# Altium PCB Zasilanie.PcbDoc
Units mil, origin at the board's own origin, x right, y up, seen from the top; angles counter-clockwise.
Board outline 3935 x 2605 mil, 2 copper layers (Top Layer, Bottom Layer); 21 components, 10 nets, 53 pads, 0 vias.
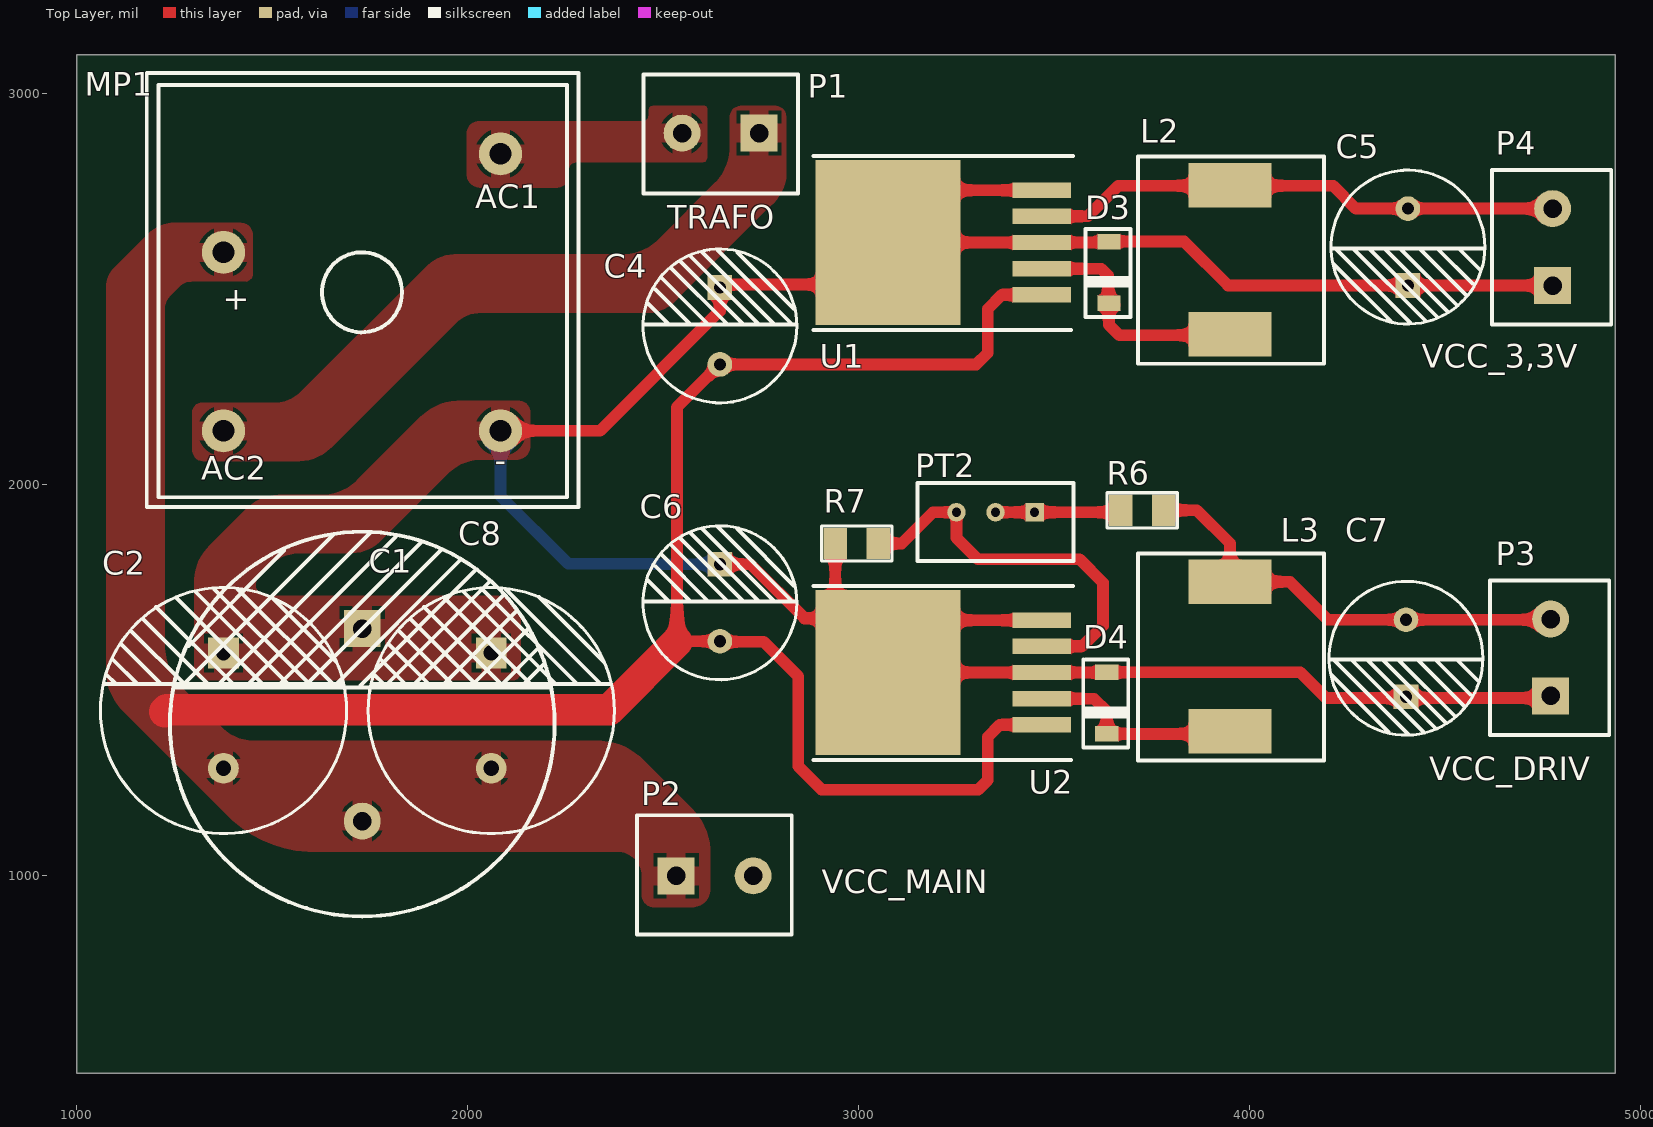
[diagram p0: Top Layer view]
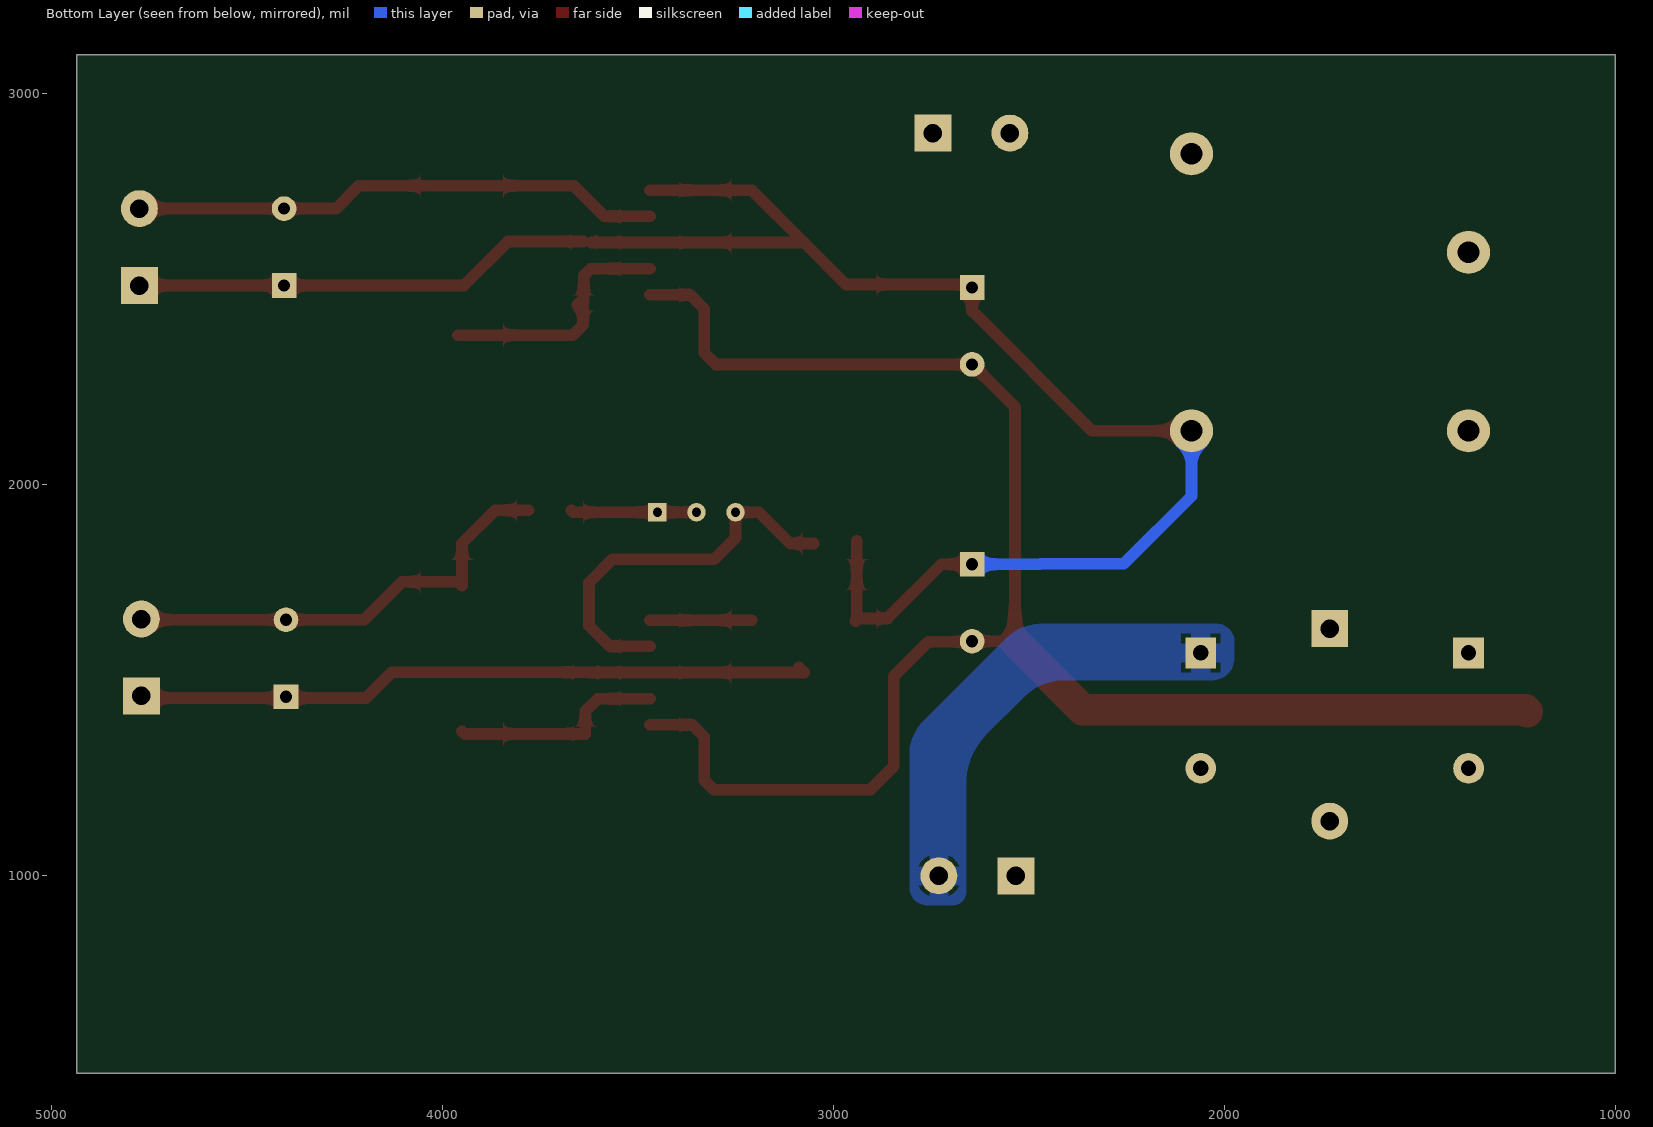
[diagram p1: Bottom Layer view, seen from below]
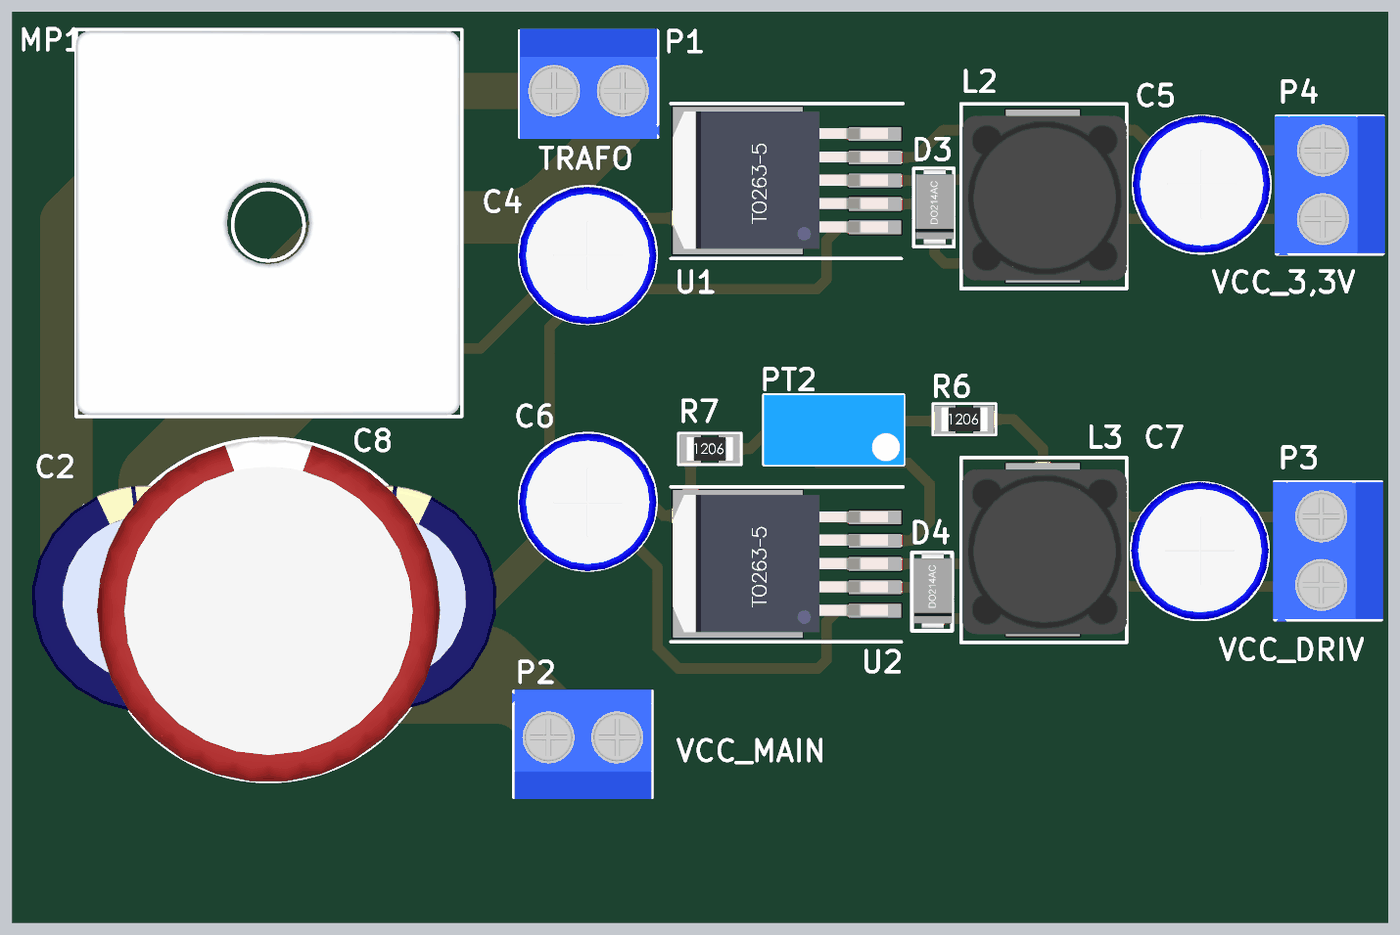
[diagram p2: 3D render of the assembled board from above, using the file's embedded part models]

## Layer stack, top to bottom
Top Solder: solder mask 0.4, Solder Resist, Dk 3.5
Top Layer: signal copper 1.4
Dielectric 1: dielectric 12.6, FR-4, Dk 4.8
Bottom Layer: signal copper 1.4
Bottom Solder: solder mask 0.4, Solder Resist, Dk 3.5

## Board outline
1000,495 4935,495 4935,3100 1000,3100

## Design rules (kind name [scope] priority, off if disabled: settings)
Clearance [All] p1: gap=10 ignorepadtopadclearanceinfootprint=FALSE except(0: Arc-Hole Track-Hole SMDPad-Hole THPad-Hole Via-Hole Fill-Hole Poly-Hole Region-Hole Text-Hole)
Height [All] p1: minheight=0 maxheight=5000 prefheight=500
PlaneConnect PlaneConnect_1 [All] p1: planeconnectstyle=Relief reliefexpansion=20 reliefentries=4 reliefconductorwidth=10 reliefairgap=10
PolygonConnect Power [All vs InNetClass('Power')] p1: thpad.connectstyle=Relief thpad.reliefconductorwidth=50 thpad.reliefentries=4 thpad.polygonreliefangle="90 Angle" thpad.airgapwidth=10 smdpad.connectstyle=Relief smdpad.reliefconductorwidth=50 smdpad.reliefentries=4 smdpad.polygonreliefangle="90 Angle" smdpad.airgapwidth=10 via.connectstyle=Direct via.reliefconductorwidth=10 via.reliefentries=4 via.polygonreliefangle="90 Angle" via.airgapwidth=10
PolygonConnect [All] p2: connectstyle=Relief reliefconductorwidth=10 reliefentries=4 polygonreliefangle="90 Angle" airgapwidth=10
RoutingVias [All] p1: holewidth=28 width=50 viastyle="Through Hole" minholewidth=28 minwidth=50 maxholewidth=28 maxwidth=50
SolderMaskExpansion [All] p1: expansion=4 istentingtop=FALSE
Width [All] p1: maxlimit=200 minlimit=10 preferedwidth=10 minimp=50.000000 maximp=50.000000 favimp=50.000000
28 further rules are at their usual default settings.

## Classes and differential pairs
net class Power: GND NetMP1_1 NetMP1_2 VCC_Main

## Components (designator, comment, footprint, x,y, rotation, side; value= is the part's Value field where it differs from the comment)
C1 "Kondesator elektrolityczny" C_POL_D16x25 2060,1570.28 r270 top
C2 "Kondesator elektrolityczny" C_POL_D16x25 1375,1570.28 r270 top
C4 "Kondesator elektrolityczny" C_POL_D10x16 2645,2505 r270 top
C5 "Kondesator elektrolityczny" C_POL_D10x16 4405,2510 r90 top
C6 "Kondesator elektrolityczny" C_POL_D10x16 2645,1796.85 r270 top
C7 "Kondesator elektrolityczny" C_POL_D10x16 4400,1458.15 r90 top
C8 "Kondesator elektrolityczny" C_POL-D25X50 1730,1632.13 r270 top
D3 "SK34SMA" DO-214AC 3640,2465 r90 top
D4 "SK34SMA" DO-214AC 3634.53,1362.99 r90 top
L2 "" DE1207 3950,2385 r0 top
L3 "" DE1207 3950,1370 r0 top
MP1 "KBPC5010W" KBPC5010W 2083.66,2138.31 r0 top
P1 "TRAFO" ARK2-5mm 2745,2900 r270 top
P2 "VCC_MAIN" ARK2-5mm 2533.15,1000 r90 top
P3 "VCC_DRIV" ARK2-5mm 4770,1460 r180 top
P4 "VCC_3,3V" ARK2-5mm 4775.02,2510 r180 top
PT2 "Potentiometer" Potecjomert 3450,1930 r180 top
R6 "Rezystor" SMD-1206-RES 3725,1935 r270 top
R7 "Rezystor" SMD-1206-RES 2995,1850 r270 top
U1 "AP1501" TO263-5L 3468.7,2486.14 r90 top
U2 "AP1501" TO263-5L 3468.7,1386.14 r90 top

## Footprints (in the part's own frame and the unit in brackets; to place one, negate y for a bottom-side part, rotate by r counter-clockwise, add the part's x,y. Pads: shape width x height; smd on the part's side, far side on the other; paste and mask are expansions set on the pad)
ARK2-5mm [mm] "ARK2-5mm"
  rect 2.4x2.4 hole 1.2: 1(0,0)
  round 2.4 hole 1.2: 2(0,-5)
  silkscreen extent -3.81,-7.51 3.94,2.54, body extent -3.94,-7.49 4.06,2.66, height 10.13
C_POL-D25X50 [mm]
  rect 2.4x2.4 hole 1.2: 1(0,0)
  round 2.4 hole 1.2: 2(12.5,0)
  silkscreen extent -6.3,-12.5 18.7,12.5, body extent -6.22,-12.5 18.78,12.5, height 50
C_POL_D10x16 [mm]
  rect 1.6x1.6 hole 0.8: 1(0,0)
  round 1.6 hole 0.8: 2(5,0)
  silkscreen extent -2.5,-5 7.5,5, body extent -2.49,-5.03 7.57,5.03, height 16.33
C_POL_D16x25 [mm]
  rect 2x2 hole 1: 1(0,0)
  round 2 hole 1: 2(7.5,0)
  silkscreen extent -4.25,-8 11.75,8, body extent -4.44,-8.24 12.05,8.24, height 26.4
DE1207 [mm]
  rect 5.4x2.9 smd: 1(0,0) 2(0,9.7)
  silkscreen extent -5.97,-1.91 6.1,11.56, body extent -5.87,-1.3 6.13,10.7, height 8
DO-214AC [mm]
  rect 1x1.5 smd: 1(0,0) 2(4,0)
  silkscreen extent -0.89,-1.4 4.83,1.52, body extent -0.71,-1.4 4.78,1.4, height 2.29
KBPC5010W [mm]
  round 2.8 hole 1.4: 1(0,18) 2(-18,0) 3(-18,11.6) 4(0,0)
  silkscreen extent -22.99,-4.95 5.08,23.24, body extent -23.03,-4.86 4.98,23.14, height 11.5
Potecjomert [mm]
  rect 1.2x1.2 hole 0.6: 1(0,0)
  round 1.2 hole 0.6: 2(2.54,0) 3(5.08,0)
  silkscreen extent -2.54,-1.91 7.62,3.18, body extent -2.54,-1.91 7.62,3.18, height 12.57
SMD-1206-RES [mil]
  rect 80x60 smd: 1(0,55) 2(0,-55)
  silkscreen extent -45,-90 45,90, body extent -34,-66 34,66, height 33
TO263-5L [mm]
  rect 1x3.8 smd: 1(0,0) 2(1.7,0) 3(3.4,0) 4(5.1,0) 5(6.8,0)
  rect 10.75x9.45 smd: 6(3.4,10)
  silkscreen extent -2.29,-2.03 9.02,14.86, body extent -1.57,-0.93 8.43,14.74, height 4.78

## Part data
D3 D4: "Dioda Schottky", Dostawca=TME, Kod TME=SK34SMA-3G-DIO, Montaż=THT, Nazwa="Dioda Schottky", Obudowa=DO-214AC, Oznaczenie=SK34SMA, Parametr_1="Prąd: 3A", Parametr_2="Max prąd imp.: 80A", Parametr_3="Max nap. wsteczne: 40V", Producent="DIOTEC SEMICONDUCTOR"
L2 L3: library part Cewka, "Cewka", Dostawca=TME, Kod TME=DE1207-68, Montaż=SMD, Nazwa="Dławik mocy", Obudowa=DE1207, Parametr_1=47uH, Parametr_2="Prąd: 2,8", Parametr_3="Rezystancja: 120mOhm", Parametr_4="Toleracja: 20%", Parametr_5=Temperatura:, Producent=FERROCORE
  L2: Oznaczenie=3
  L3: Oznaczenie=DE1207-68
MP1: "Mostek porstowniczy", Kod TME=KBPC5010W, Montaż=THT, Nazwa="Mostek prostowniczy", Obudowa=MB-25W, Oznaczenie=KBPC5010W, Parametr_1="Prad: 50A", Parametr_2="Max Prad w impulsie: 500A", Parametr_3="Max Nap przewodzenia: 1,1V", Parametr_4="Max Nap wsteczne: 1kV", Parametr_5=Jednofazowy, Producent="DC COMPONENTS"
P1 P2 P3 P4: library part "Złacze śrubowe", Dostawca=TME, Kod TME=DG300-5.0-2P12, Montaż=THT, Nazwa="Listwa zaciskowa do druku, XY301V-2P", Parametr_1=250VDC/AC, Parametr_2=24A, Parametr_3=2,5mm2, Producent="DEGSON ELECTRONICS"
  P1: Oznaczenie=Transformator
  P2: Oznaczenie=Zasilanie
  P3: Oznaczenie=VCC_Driv
  P4: Oznaczenie=VCC_3,3V
PT2: "Potentiometer montażowy wielobortowy", Nazwa="Potentiometer montażowy wielobortowy", Parametr_1=10k, Parametr_2=Moc:, Parametr_3=Tolerancja:, Parametr_4=Charakterystyka:, Parametr_5="Temperatura pracy:", Parametr_6="Max nap. pracy:"
U1 U2: "przetwornica DC/DC buck", Dostawca=TME, Nazwa="przetwornica DC/DC buck", Parametr_2="Prąd: 3A", Parametr_3="Częstotliwość: 150kHz", Parametr_4="Temperatura: -20-85C", Parametr_5="Sprawność: 73%", Producent="DIODES INCORPORATED"
  U1: Kod TME=AP1501-33K5G-13, Oznaczenie=AP1501-3.3, Parametr_1="Nap. wy: 3.3V"
  U2: Kod TME=AP1501-K5G-13, Oznaczenie=AP1501-K5G-13, Parametr_1="Nap. wy: 1,23-37VV"
C1 C2: Dostawca=TME, Kod TME=UHW1H122MHD, Montaż=THT, Nazwa="Kondesator elektrolityczny", Obudowa=D16x25, Parametr_1=1200uF, Parametr_2=50V, Parametr_3=Tolerancja:, Parametr_4="Czas życzia:", Parametr_5="Temperatura pracy:"
C4 C6: Dostawca=TME, Kod TME=PF1H221MNN1016, Montaż=THT, Nazwa="Kondesator elektrolityczny", Obudowa=D10x16, Parametr_1=220uF, Parametr_2=50V, Parametr_3=Tolerancja:, Parametr_4="Czas życzia:", Parametr_5="Temperatura pracy:"
C5: Dostawca=TME, Kod TME=CE-220/16PHT-Y, Montaż=THT, Nazwa="Kondesator elektrolityczny", Obudowa=D10x16, Parametr_1=220uF, Parametr_2=50V, Parametr_3=Tolerancja:, Parametr_4="Czas życzia:", Parametr_5="Temperatura pracy:"
C7: Dostawca=TME, Kod TME=JRG-220U/25, Montaż=THT, Nazwa="Kondesator elektrolityczny", Obudowa=D10x16, Parametr_1=220uF, Parametr_2=50V, Parametr_3=Tolerancja:, Parametr_4="Czas życzia:", Parametr_5="Temperatura pracy:"
C8: Dostawca=TME, Nazwa="Kondesator elektrolityczny", Parametr_1=2200uF, Parametr_2=50V, Parametr_3=Tolerancja:, Parametr_4="Czas życzia:", Parametr_5="Temperatura pracy:"
R6: Nazwa=Rezystor, Parametr_1=10k, Parametr_2="Moc: 0,25W", Parametr_3="Tolerancja: 1%", Parametr_4="Max nap. pracy:", Parametr_5="Max nap impulsowe:"
R7: Nazwa=Rezystor, Parametr_1=1k, Parametr_2="Moc: 0,25W", Parametr_3="Tolerancja: 1%", Parametr_4="Max nap. pracy:", Parametr_5="Max nap impulsowe:"

## Nets (pads, with @x,y where several pads share a name; then routed paths per layer and width w, separated by ;. In a path a pad name is that pad's centre, name@x,y a point inside that pad or via, vN(x,y) a via of type N, cw(c..) or ccw(c..) an arc to the next point about the centre after c; other vN are vias at no path point)
GND: C1.1 C2.1 C4.1 C5.1 C6.1 C7.1 C8.1 D3.2 D4.2 MP1.4 P2.2 P3.1 P4.1 R7.2 U1.3 U1.5 U1.6 U2.3 U2.5 U2.6 | length 6735.5
  Top Layer w30: MP1.4 2338.31,2138.31 2645,2445 C4.1 2651.5,2511.5 2679.13,2511.5 2680.15,2512.51 2967.51,2512.51 U1.6 ; C6.1 2723.15,1796.85 2861.55,1658.45 2936.55,1658.45 U2.6@2940,1655 ; R7.2@2940,1857.42 R7.2 U2.6@2940,1655 ; U2.6@2943.27,1651.73 U2.6@2940,1655 ; U2.6@3087.8,1532.8 U2.6 U2.3 D4.2@3625,1520 ; U2.6@3208.86,1653.86 U2.5 ; U1.5 3208.86,2753.86 U1.6 ; D3.2@3618.5,2620.2 3468.9,2620.2 U1.3 U1.6 ; D4.2 4129.53,1520.47 4195,1455 P3.1@4753.21,1455 ; D3.2 3832.52,2622.48 3945,2510 C5.1 P4.1
  Bottom Layer w20: 2470,1798.15 2471.3,1796.85
  Bottom Layer w30: MP1.4 2083.66,1971.34 2256.85,1798.15 2470,1798.15 ; 2471.3,1796.85 C6.1
NetD3_1: D3.1 L2.1 U1.2 | length 648.9
  Top Layer w30: U1.2 3620.69,2553.07 3638.26,2535.5 3638.26,2469.69 3645.16,2469.69 D3.1@3654.53,2460.31 ; D3.1 3640,2460.31 3640,2410 3666.89,2383.11 L2.1@3960,2383.11
NetD4_1: D4.1 L3.1 U2.2 | length 555.2
  Top Layer w30: U2.2 3601.93,1453.07 3634.53,1420.47 D4.1 3942.99,1362.99 L3.1
NetMP1_1: MP1.1 P1.2
NetMP1_2: MP1.2 P1.1
NetPT2_1: PT2.1 PT2.2 R6.2 | length 322.1
  Top Layer w30: PT2.2 3665,1930 R6.2
NetPT2_3: PT2.3 R7.1 U2.4 | length 1009.1
  Top Layer w30: R7.1 3110,1850 3190,1930 PT2.3 3250,1865 3305,1810 3565,1810 3625,1750 3625,1640 3571.93,1586.93 U2.4
VCC_3,3V: C5.2 L2.2 P4.2 U1.4 | length 1345.9
  Top Layer w30: U1.4 3585.74,2686.93 3663.81,2765 L2.2@4030,2765 ; L2.2@4040,2765 4213.83,2765 4271.98,2706.85 C5.2 P4.2@4768.15,2706.85
VCC_Driv: C7.2 L3.2 P3.2 R6.1 | length 1157.4
  Top Layer w30: R6.1 3865,1935 3950,1850 L3.2@3950,1741.89 ; L3.2 4103.11,1751.89 4200,1655 4377.57,1655 C7.2@4388.79,1643.79 ; C7.2 P3.2@4760.53,1655
VCC_Main: C1.2 C2.2 C4.2 C6.2 C8.2 MP1.3 P2.1 U1.1 U2.1 | length 4459.8
  Top Layer w30: C4.2 2535,2198.15 2535,1598.43 2536.57,1600 C6.2 2646.59,1598.41 2756.59,1598.41 2845,1510 2845,1280 2905,1220 3305.71,1220 3330,1244.29 3330,1355 3361.14,1386.14 U2.1 ; C4.2@2647.86,2308.15 3300.71,2308.15 3330,2337.44 3330,2450 3366.14,2486.14 U1.1
  Top Layer w80: 1225,1420 1230,1425 2361.57,1425 2535,1598.43

## Polygon pours and split planes (outlines as drawn)
GND on Top Layer "GND_L01_P003" (solid, pour order 3): 2124.14,2064.14 2034.14,2064.14 ccw(c2034.14,1943.45) 1948.79,2028.79 1777.68,1857.68 cw(c1698.79,1936.56) 1698.79,1825 1571.21,1825 ccw(c1571.21,1713.44) 1492.32,1792.32 1465.61,1765.61 ccw(c1486.21,1745) 1486.21,1715.86 2074.15,1715.85 cw(c2074.15,1655) 2135,1655 2135,1520 cw(c2115.01,1519.99) 2115,1500 1330,1500 cw(c1330,1530) 1300,1530 1300,1751.72 cw(c1428.64,1751.72) 1337.68,1842.68 1433.79,1938.79 cw(c1521.21,1851.37) 1521.21,1975 1626.72,1975 ccw(c1626.72,2103.64) 1717.68,2012.68 1878.79,2173.79 cw(c1978.28,2074.3) 1978.28,2215 2130,2215 cw(c2130,2185) 2160,2185 2160,2100 cw(c2124.15,2100)
VCC_Main on Top Layer "VCC_MAIN_L01_P005" (solid, pour order 5): 2575.25,1169.75 2446.21,1298.79 ccw(c2334.66,1187.24) 2334.64,1345 2254.02,1345 1456.21,1345 cw(c1456.21,1468.64) 1368.79,1381.21 1270.4,1479.6 cw(c1380,1589.2) 1225,1589.2 1225,2452.93 cw(c1266.2,2452.93) 1237.07,2482.07 1262.93,2507.93 cw(c1292.05,2478.82) 1292.07,2520 1430,2520 ccw(c1430,2539.99) 1450,2540 1450,2640 ccw(c1420.01,2640) 1420,2670 1249.14,2670 ccw(c1249.12,2575.55) 1182.32,2642.32 1095.61,2555.61 ccw(c1145.33,2505.87) 1075,2505.86 1075,1525.35 ccw(c1220.71,1525.35) 1117.68,1422.32 1388.43,1151.57 ccw(c1605.37,1368.51) 1605.37,1061.71 2383.29,1061.71 cw(c2383.29,1000) 2445,1000 2445,950 ccw(c2475,950) 2475,920 2575,920 ccw(c2575,965) 2620,965 2620,1061.72 ccw(c2467.23,1061.72)
NetMP1_2 on Top Layer "NETMP1_2_L01_P002" (solid, pour order 2): 1325,2060 1563.46,2060 ccw(c1563.46,2184.42) 1651.44,2096.44 1967.33,2412.33 cw(c2034.13,2345.53) 2034.15,2440 2469.69,2440 ccw(c2456.85,2544.18) 2539.59,2479.59 2768.88,2708.88 ccw(c2693.65,2805.26) 2815,2790.31 2815,2940 ccw(c2785,2940) 2785,2970 2700,2970 ccw(c2699.99,2940.01) 2670,2940 2670,2863.28 cw(c2541.4,2863.27) 2632.32,2772.32 2487.99,2627.99 cw(c2396.29,2719.68) 2396.28,2590 1970.04,2590 ccw(c1970,2481.35) 1893.15,2558.15 1574.38,2239.38 cw(c1503.46,2310.29) 1503.45,2210 1320,2210 ccw(c1320,2185) 1295,2185 1295,2090 ccw(c1325,2090)
NetMP1_1 on Top Layer "NETMP1_1_L01_P001" (solid, pour order 1): 2027.5,2930 2447.5,2930 ccw(c2447.5,2945) 2462.5,2945 2462.5,2957.5 cw(c2475,2957.5) 2475,2970 2605,2970 cw(c2605,2962.5) 2612.5,2962.5 2612.5,2837.5 cw(c2600,2837.5) 2600,2825 2277.5,2825 ccw(c2277.5,2805) 2257.5,2805 2257.5,2790 cw(c2227.5,2790) 2227.5,2760 2032.5,2760 cw(c2032.5,2795) 1997.5,2795 1997.5,2900 cw(c2027.5,2900)
GND on Bottom Layer "GND_L02_P006" (solid, pour order 6): 2020,1645 2466.72,1645 cw(c2466.72,1516.37) 2557.68,1607.32 2768.79,1396.21 cw(c2681.37,1308.79) 2805,1308.79 2805,970 cw(c2760,970) 2760,925 2695,925 cw(c2695,960) 2660,960 2660,1236.72 ccw(c2483.08,1236.72) 2608.18,1361.82 2512.68,1457.32 ccw(c2409.65,1354.3) 2409.64,1500 2031.54,1500 cw(c2031.53,1557.46) 1974.07,1557.46 1974.07,1599.07 cw(c2020,1599.07)

## Silkscreen, mask and mechanical layers (free items; w line width, h text height)
Board Shape:
  the board outline again, w10
Poligons:
  lines w20: 2257.5,1275 2257.5,1320.93
  lines w150: 1370.28,1570.28 2060,1570.28 2494.72,1570.28 2730,1335 2730,1130 2730,1000 ; 1375,1570.28 1375,1780 1495,1900 1710,1900 1948.31,2138.31 2083.66,2138.31 ; 1375,2138.31 1578.31,2138.31 1955,2515 2480,2515 2745,2780 2745,2900 ; 1375,2595 1245,2595 1150,2500 1150,1500 1375,1275 1395,1295 2040,1295 2060,1275 2257.5,1275 2360,1275 2529.07,1105.93 2529.07,995.93 ; 2083.66,2846.97 2251.97,2846.97 2305,2900 2548.15,2900

## Text inside footprints (layer, text, board x,y; h text height)
MP1: Top Overlay "+" at 1373.66,2448.31 h60; Top Overlay "-" at 2068.66,2033.31 h60; Top Overlay "AC1" at 2018.66,2708.31 h60; Top Overlay "AC2" at 1318.66,2013.31 h60